# EAGLE board nixie_test (EAGLE 6.1)
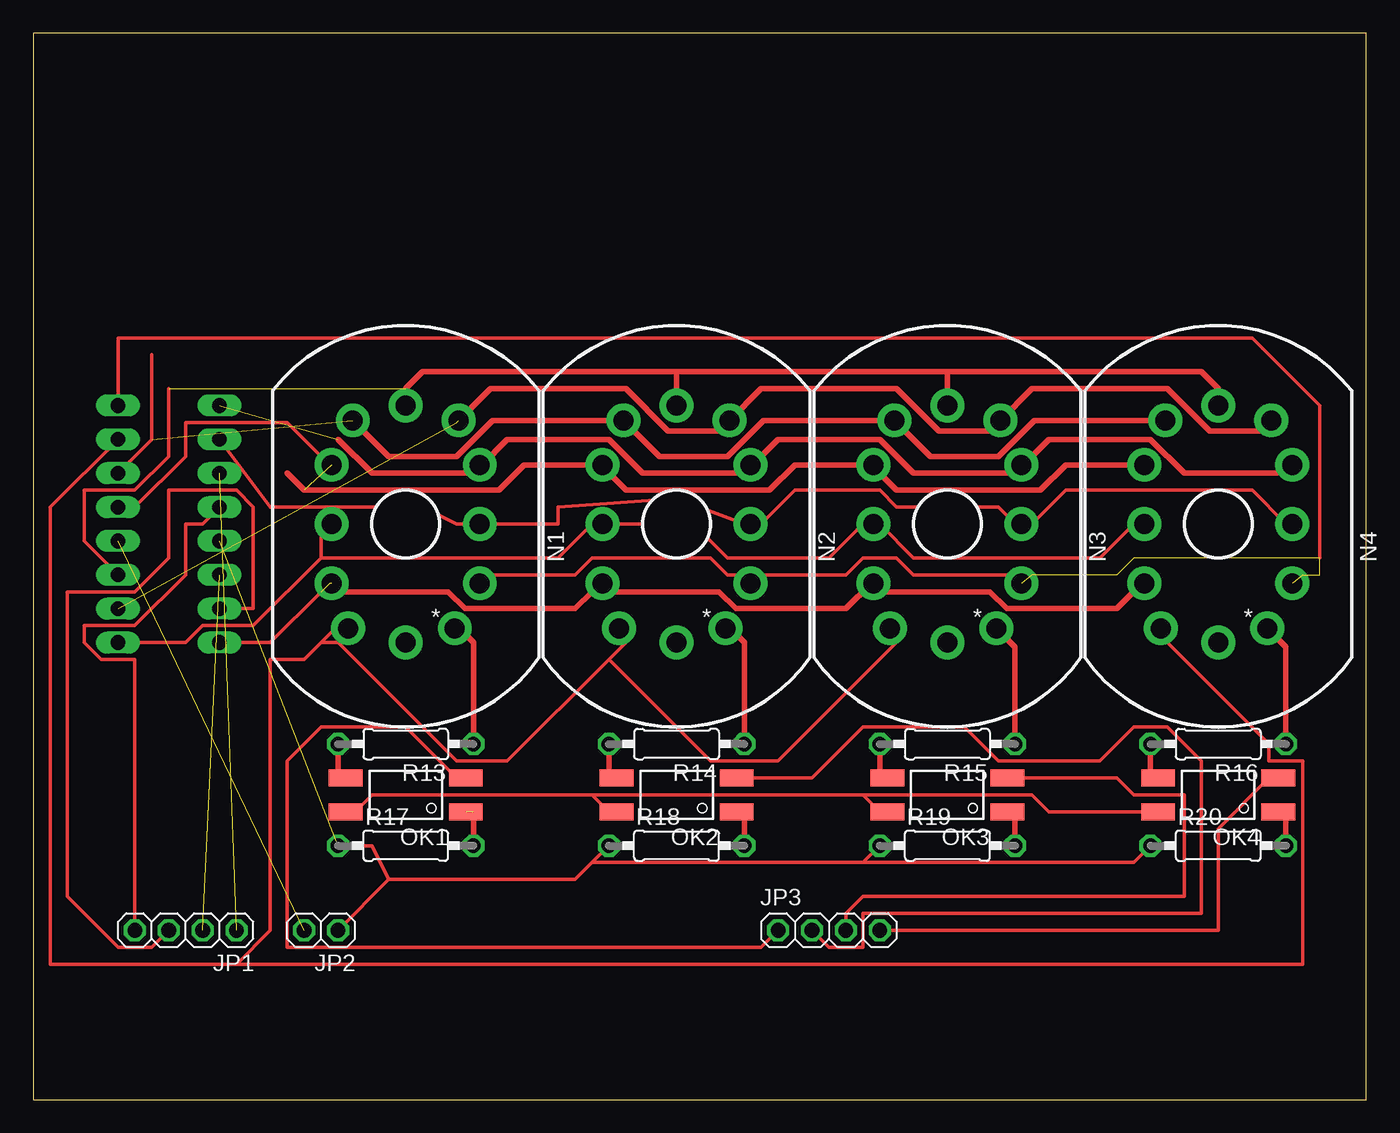
[diagram p0: board, top side]
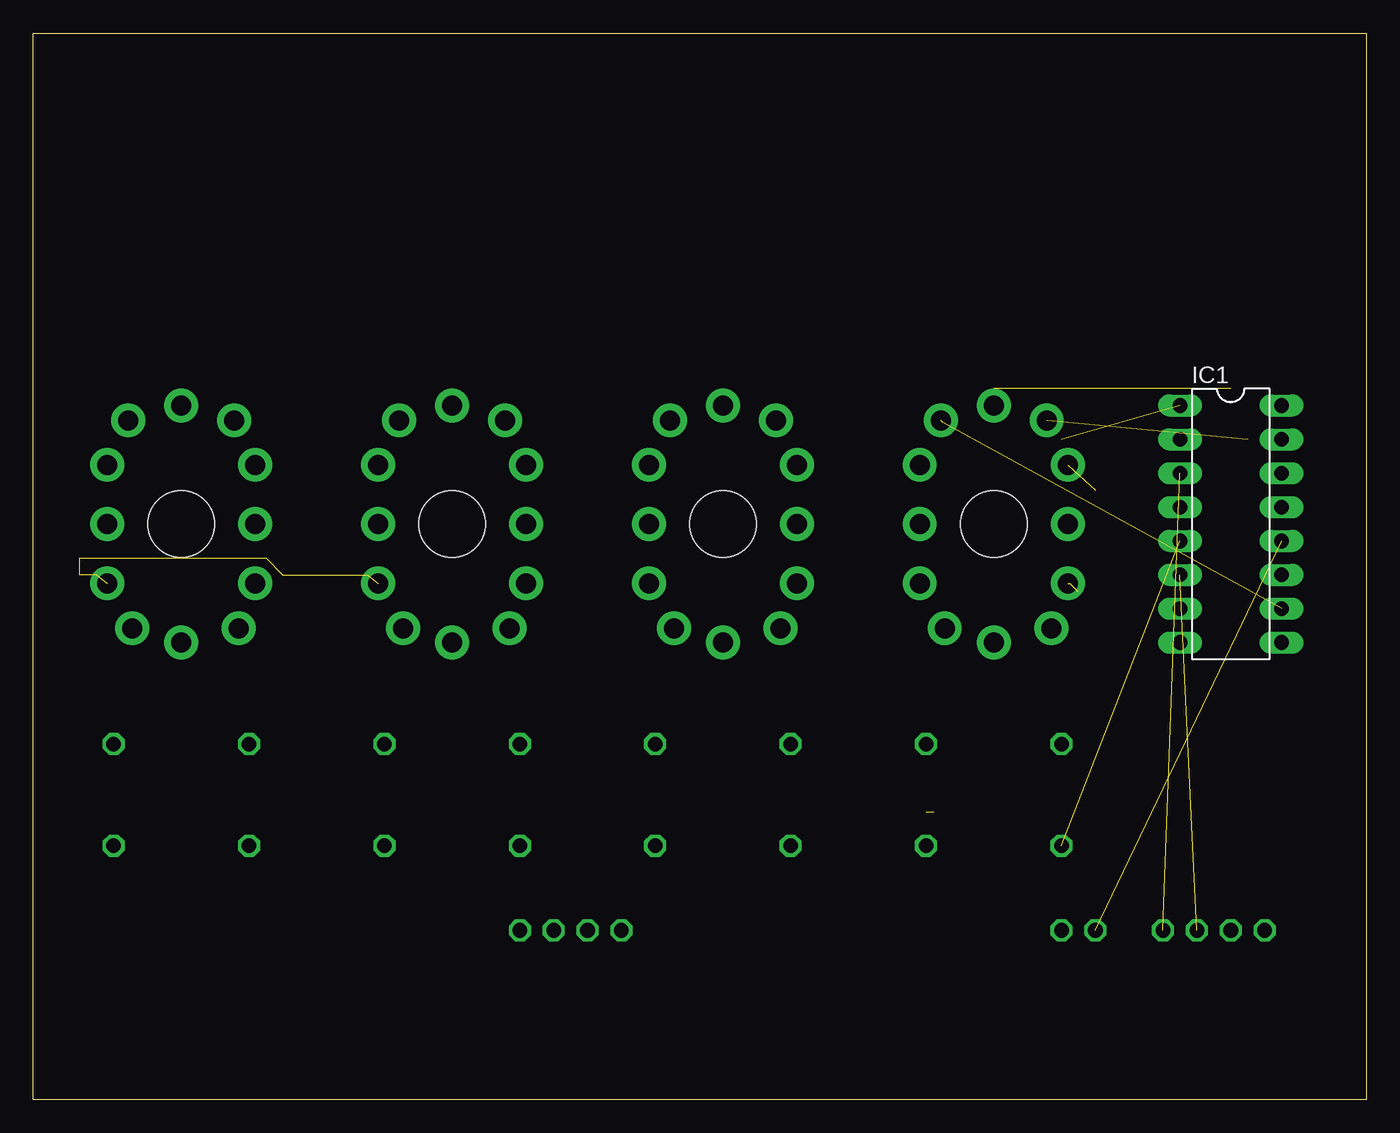
[diagram p1: board, bottom side, seen from below]

Size 100 x 80 mm. Coordinates in mm from the lower left corner, seen from the top.
Outline: 0,0 100,0 100,80 0,80 0,0
Copper layers (1*16): Top 0.035mm / dielectric 1.5mm / Bottom 0.035mm
Design rules: minimum track width 10mil, minimum drill 24mil, track to track 8mil, track to pad 8mil, pad to pad 8mil, via to via 8mil, smd to smd 8mil, copper to edge 40mil, drill to drill 8mil, minimum pad ring 10mil, minimum via ring 8mil, stop-mask expansion 4mil, vias tented up to drill 0mil, thermal gap 10mil

## Footprints (pad centres in the part's own frame; a part is rotated, then mirrored left to right if it is on the bottom)
DIL16 = drill 1.1 long: 1 -8.89,-3.81; 2 -6.35,-3.81; 3 -3.81,-3.81; 4 -1.27,-3.81; 5 1.27,-3.81; 6 3.81,-3.81; 7 6.35,-3.81; 8 8.89,-3.81; 9 8.89,3.81; 10 6.35,3.81; 11 3.81,3.81; 12 1.27,3.81; 13 -1.27,3.81; 14 -3.81,3.81; 15 -6.35,3.81; 16 -8.89,3.81
1X04 = drill 1.1 octagon: 1 -3.81,0; 2 -1.27,0; 3 1.27,0; 4 3.81,0
1X02 = drill 1.1 octagon: 1 -1.27,0; 2 1.27,0
IN-12 = drill 1.5 pad 2.54: 0 5.556,-4.445; 1 -4.317,-7.817; 2 -5.556,-4.445; 3 -5.556,0; 4 -5.556,4.445; 5 -3.969,7.779; 6 0,8.89; 7 3.969,7.779; 8 5.556,4.445; 9 5.556,0; A 3.683,-7.817; LHDP 0,-8.89 | hole 5: 0,0
4-SMD = smd 2.54 x 1.27: 1 -4.51,1.27; 2 -4.51,-1.27; 3 4.51,-1.27; 4 4.51,1.27
0207/10 = drill 1.1 octagon: 1 -5.08,0; 2 5.08,0

## Placement (x,y rotation side)
IC1  74141N  [DIL16]  10.16,43.18 270 bottom
JP1  [1X04]  11.43,12.7 180 top
JP2  [1X02]  21.59,12.7 180 top
JP3  [1X04]  59.69,12.7 0 top
N1  IN-12B  [IN-12]  27.94,43.18 0 top
N2  IN-12B  [IN-12]  48.26,43.18 0 top
N3  IN-12B  [IN-12]  68.58,43.18 0 top
N4  IN-12B  [IN-12]  88.9,43.18 0 top
OK1  TLP627  [4-SMD]  27.94,22.86 180 top
OK2  TLP627  [4-SMD]  48.26,22.86 180 top
OK3  TLP627  [4-SMD]  68.58,22.86 180 top
OK4  TLP627  [4-SMD]  88.9,22.86 180 top
R13  [0207/10]  27.94,26.67 180 top
R14  [0207/10]  48.26,26.67 180 top
R15  [0207/10]  68.58,26.67 180 top
R16  [0207/10]  88.9,26.67 180 top
R17  [0207/10]  27.94,19.05 0 top
R18  [0207/10]  48.26,19.05 0 top
R19  [0207/10]  68.58,19.05 0 top
R20  [0207/10]  88.9,19.05 0 top

## Library data of the parts
IC1 JP1-JP3 N1-N4 R13-R20 = nixie_tube
OK1-OK4 = nixie_tube; OC_FARNELL: unknown; OC_NEWARK: unknown

## Nets
+5V: IC1.5 JP2.1 R17.1 R18.1 R19.1 R20.1
+24V: OK1.4 OK2.4 OK3.4 OK4.4
A1: JP3.1 OK1.2
A2: JP3.2 OK2.2
A3: JP3.3 OK3.2
A4: JP3.4 OK4.2
C0: IC1.16 N1.0 N2.0 N3.0 N4.0
C1: IC1.15 N1.1 N2.1 N3.1 N4.1
C2: IC1.8 N1.2 N2.2 N3.2 N4.2
C3: IC1.9 N1.3 N2.3 N3.3 N4.3
C4: IC1.13 N1.4 N2.4 N3.4 N4.4
C5: IC1.14 N1.5 N2.5 N3.5 N4.5
C6: IC1.11 N1.6 N2.6 N3.6 N4.6
C7: IC1.10 N1.7 N2.7 N3.7 N4.7
C8: IC1.1 N1.8 N2.8 N3.8 N4.8
C9: IC1.2 N1.9 N2.9 N3.9 N4.9
GND: IC1.12 JP2.2
N$1: IC1.3 JP1.1
N$2: IC1.6 JP1.2
N$3: IC1.7 JP1.3
N$4: IC1.4 JP1.4
N$13: N1.A R13.1
N$14: OK1.3 R13.2
N$15: N2.A R14.1
N$16: OK2.3 R14.2
N$17: N3.A R15.1
N$18: OK3.3 R15.2
N$19: N4.A R16.1
N$20: OK4.3 R16.2
N$21: OK1.1 R17.2
N$22: OK2.1 R18.2
N$23: OK3.1 R19.2
N$24: OK4.1 R20.2

## Tracks (layer width: path | path; a pad name or v marks a point on that pad's centre or on a via)
+5V  (1 unrouted)
  Top 0.254: 26.67,16.51 JP2.1 | R18.1 41.91,17.78 | 41.91,17.78 40.64,16.51 26.67,16.51 | R17.1 25.4,19.05 26.67,16.51 | 62.23,17.78 R19.1 | 41.91,17.78 62.23,17.78 | R20.1 82.55,17.78 62.23,17.78
+24V
  Top 0.254: 41.91,22.86 25.4,22.86 24.13,21.59 OK1.4 | 41.91,22.86 43.18,21.59 OK2.4 | 62.23,22.86 63.5,21.59 OK3.4 | 41.91,22.86 62.23,22.86 | OK4.4 76.2,21.59 74.93,22.86 62.23,22.86
A1
  Top 0.254: JP3.1 54.61,11.43 19.05,11.43 19.05,25.4 21.59,27.94 27.94,27.94 31.75,24.13 OK1.2
A2
  Top 0.254: OK2.2 58.42,24.13 62.23,27.94 69.85,27.94 72.39,25.4 80.01,25.4 82.55,27.94 85.09,27.94 87.63,25.4 87.63,13.97 62.23,13.97 62.23,11.43 59.69,11.43 JP3.2
A3
  Top 0.254: OK3.2 81.28,24.13 82.55,22.86 86.36,22.86 86.36,15.24 62.23,15.24 60.96,13.97 JP3.3
A4
  Top 0.254: JP3.4 88.9,12.7 88.9,20.32 92.71,24.13 OK4.2
C0  (7 unrouted)
  Top 0.254: N1.0 34.29,39.37 40.64,39.37 41.91,40.64 50.8,40.64 52.07,39.37 53.34,39.37 N2.0 54.61,39.37 60.96,39.37 62.23,40.64 64.77,40.64 66.04,39.37 73.66,39.37 N3.0 | IC1.16 6.35,57.15 91.44,57.15 96.52,52.07 96.52,40.64
C1
  Top 0.254: IC1.15 1.27,44.45 1.27,10.16 15.24,10.16 | 15.24,10.16 17.78,12.7 17.78,33.02 20.32,33.02 21.59,34.29 | 21.59,34.29 22.86,35.56 N1.1 | 43.18,33.02 35.56,25.4 31.75,25.4 22.86,34.29 21.59,34.29 | 43.18,33.02 44.45,34.29 N2.1 | 43.18,33.02 50.8,25.4 55.88,25.4 64.77,34.29 N3.1 | 15.24,10.16 95.25,10.16 95.25,25.4 92.71,25.4 92.71,26.67 85.09,34.29 N4.1
C2  (2 unrouted)
  Top 0.254: IC1.8 17.78,34.29 21.59,38.1
  Top 0.406: N4.2 83.19,38.73 81.28,36.83 73.03,36.83 71.75,38.1 63.5,38.1 62.87,38.73 | 62.87,38.73 60.96,36.83 52.7,36.83 51.44,38.1 43.34,38.1 N2.2 42.07,38.1 41.91,38.1 40.64,36.83 32.38,36.83 31.11,38.1 22.86,38.1 22.23,38.73 | N3.2 62.87,38.73
C3
  Top 0.254: N4.3 82.55,43.18 80.01,40.64 66.04,40.64 63.5,43.18 N3.3 62.23,43.18 59.69,40.64 52.07,40.64 49.53,43.18 N2.3 41.91,43.18 39.37,40.64 21.59,40.64 | IC1.9 11.43,34.29 12.7,35.56 16.51,35.56 21.59,40.64 | 21.59,40.64 21.59,43.18 N1.3
C4  (1 unrouted)
  Top 0.254: IC1.13 7.62,44.45 11.43,48.26 11.43,50.8 19.05,50.8 21.59,48.26 N1.4
  Top 0.406: N4.4 77.47,47.62 75.56,45.72 64.77,45.72 62.87,47.62 | 62.87,47.62 57.15,47.62 55.24,45.72 44.45,45.72 42.55,47.62 | 42.55,47.62 36.83,47.62 34.92,45.72 20.32,45.72 19.05,46.99 | 42.55,47.62 N2.4 | 62.87,47.62 N3.4
C5  (1 unrouted)
  Top 0.254: IC1.14 8.89,49.53 8.89,55.88
  Top 0.406: N4.5 75.09,50.96 72.39,48.26 67.31,48.26 N3.5 54.77,50.96 52.07,48.26 46.99,48.26 N2.5 34.45,50.96 31.75,48.26 26.67,48.26 N1.5
C6  (1 unrouted)
  Top 0.254: IC1.11 3.81,41.91 3.81,45.72 7.62,45.72 10.16,48.26 10.16,53.34
  Top 0.406: N1.6 27.94,53.34 29.21,54.61 48.26,54.61 | N2.6 48.26,54.61 | 48.26,54.61 68.58,54.61 | 68.58,54.61 87.63,54.61 88.9,53.34 N4.6 | N3.6 68.58,54.61
C7  (2 unrouted)
  Top 0.406: 31.75,50.8 34.29,53.34 44.45,53.34 47.62,50.16 51.44,50.16 N2.7 54.61,53.34 64.77,53.34 67.94,50.16 71.75,50.16 N3.7 74.93,53.34 85.09,53.34 88.27,50.16 92.08,50.16 N4.7
C8  (1 unrouted)
  Top 0.406: N4.8 93.98,47.62 93.34,46.99 86.36,46.99 83.82,49.53 76.2,49.53 74.3,47.62 | 53.34,46.99 55.88,49.53 63.5,49.53 66.04,46.99 73.66,46.99 74.3,47.62 | 53.34,46.99 45.72,46.99 43.18,49.53 35.56,49.53 33.66,47.62 N1.8 33.5,47.47 33.02,46.99 25.4,46.99 22.86,49.53 | 74.3,47.62 N3.8 | 53.34,46.99 53.34,47.15 N2.8
C9
  Top 0.254: N4.9 93.98,43.18 91.44,45.72 77.47,45.72 74.93,43.18 N3.9 73.66,43.18 72.39,44.45 64.77,44.45 63.5,45.72 57.15,45.72 54.61,43.18 N2.9 53.34,43.18 48.26,45.09 39.37,44.45 39.37,43.18 N1.9 31.75,43.18 29.21,44.45 17.78,44.45 IC1.2
GND  (1 unrouted)
N$1  (1 unrouted)
N$2  (1 unrouted)
N$3
  Top 0.254: JP1.3 8.89,11.43 6.35,11.43 2.54,15.24 2.54,38.1 7.62,38.1 10.16,40.64 10.16,45.72 15.24,45.72 16.51,44.45 16.51,36.83 IC1.7
N$4
  Top 0.254: JP1.4 7.62,33.02 5.08,33.02 3.81,34.29 3.81,35.56 7.62,35.56 11.43,39.37 11.43,43.18 12.7,43.18 IC1.4
N$13
  Top 0.406: R13.1 33.02,34.29 31.75,35.56 31.62,35.43 N1.A
N$14
  Top 0.254: 22.86,24.13 OK1.3
  Top 0.406: R13.2 22.86,24.13
N$15
  Top 0.406: R14.1 53.34,34.29 52.07,35.56 51.94,35.43 N2.A
N$16
  Top 0.254: 43.18,24.13 OK2.3
  Top 0.406: R14.2 43.18,24.13
N$17
  Top 0.406: R15.1 73.66,33.97 N3.A
N$18
  Top 0.254: 63.5,24.13 OK3.3
  Top 0.406: R15.2 63.5,24.13
N$19
  Top 0.406: R16.1 93.98,33.97 N4.A
N$20
  Top 0.406: R16.2 83.82,24.7 OK4.3
N$21  (1 unrouted)
  Top 0.406: R17.2 33.02,21.59
N$22
  Top 0.254: 53.34,21.59 OK2.1
  Top 0.406: R18.2 53.34,21.59
N$23
  Top 0.406: R19.2 73.66,21.02 OK3.1
N$24
  Top 0.406: R20.2 93.98,21.02 OK4.1